# Allegro board DEVBOARD.brd
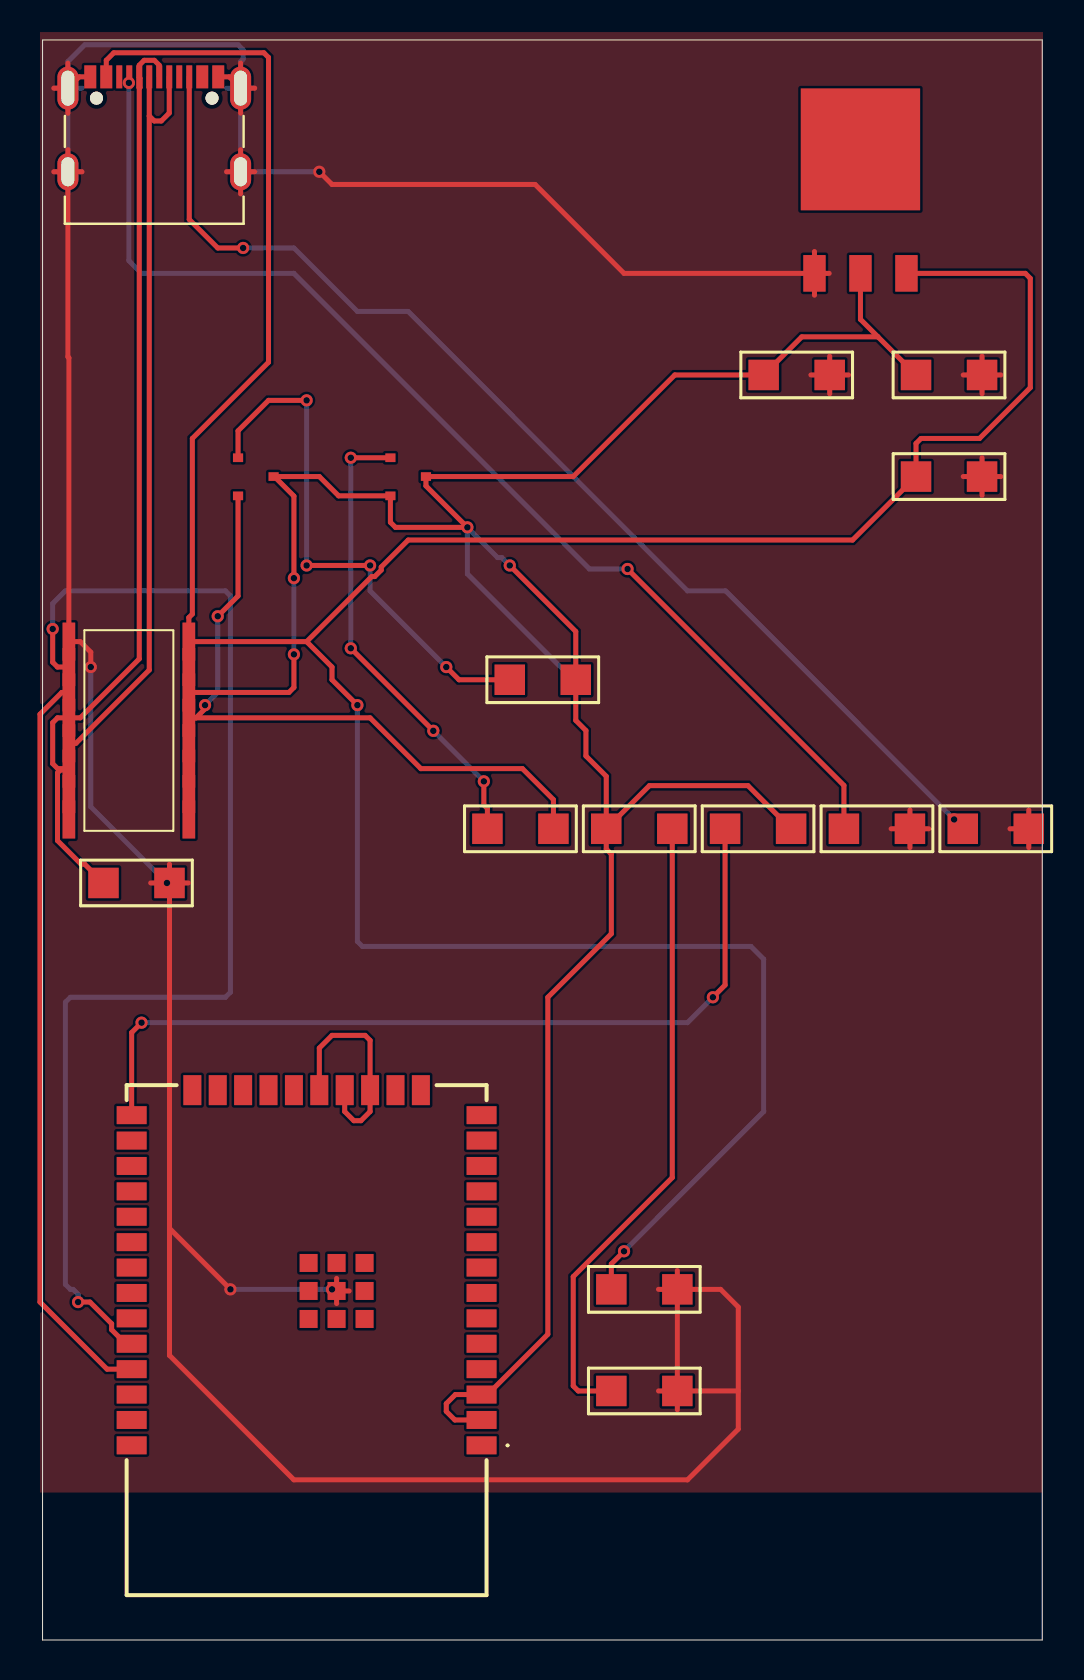
[diagram p0: board, top side]
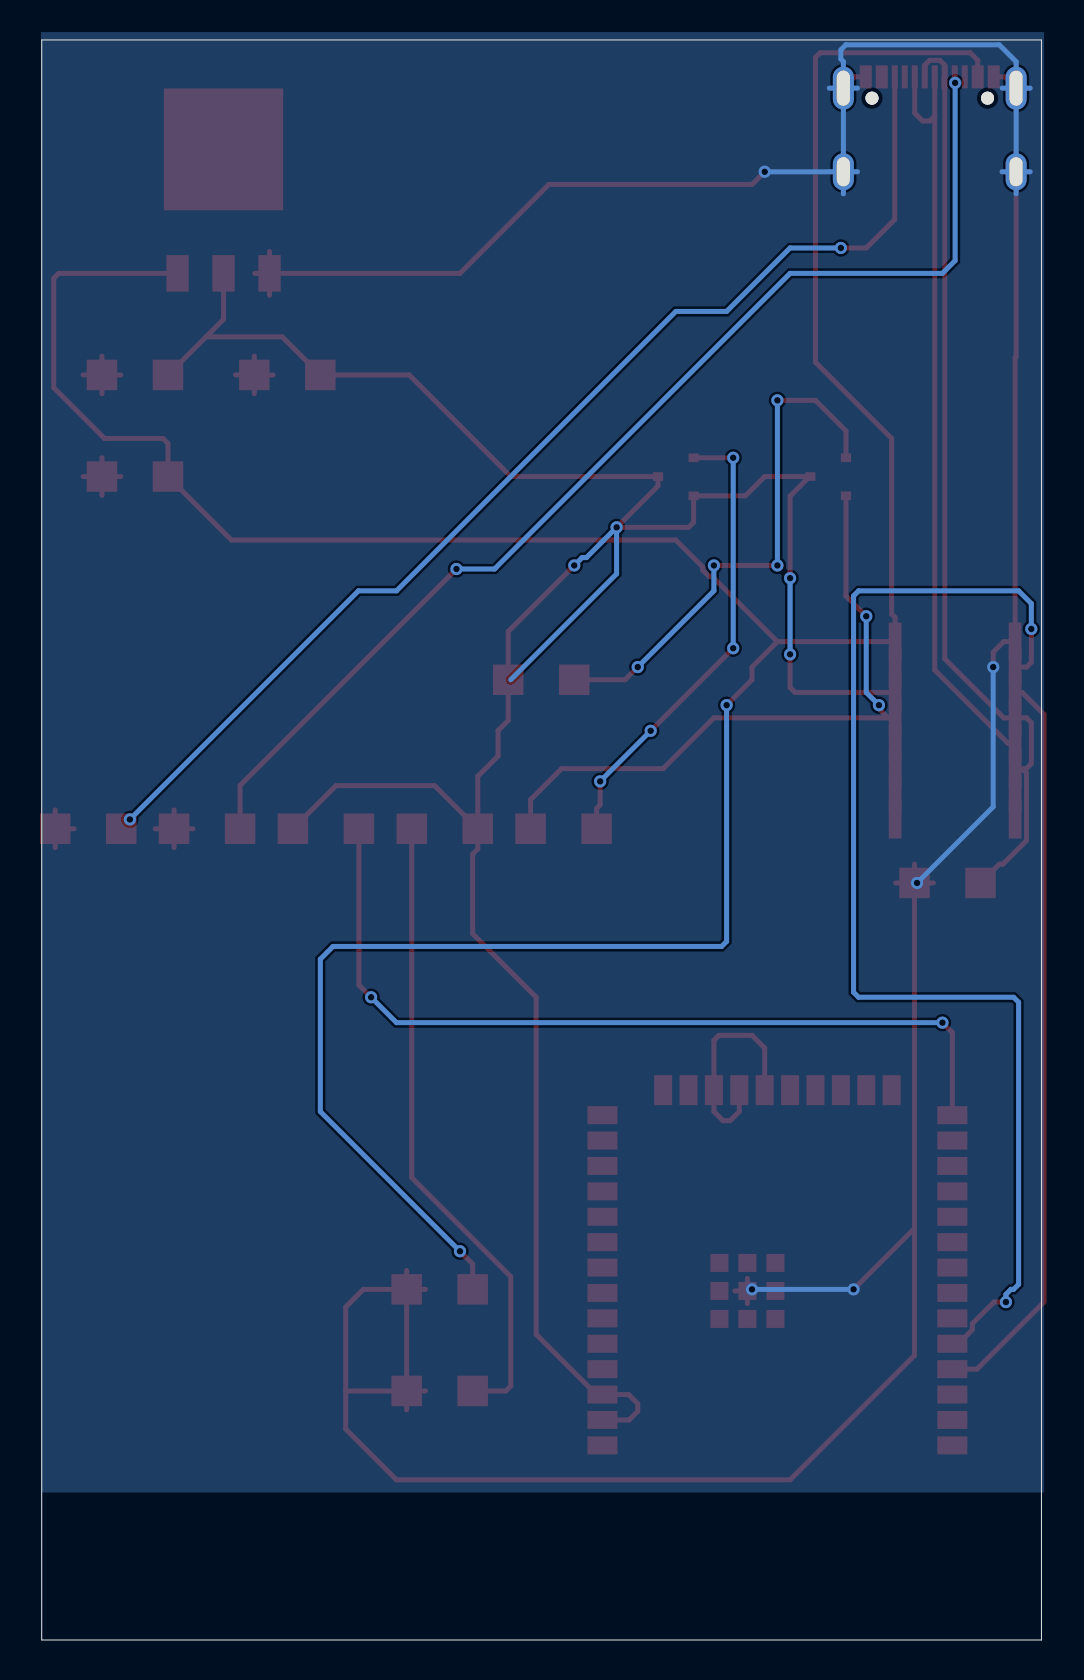
[diagram p1: board, bottom side, seen from below]

Outline 50 x 80 mm; copper layers: TOP, BOTTOM. Coordinates in mm from the lower left corner of the outline.
Outline path: 0,80 50,80 50,0 0,0 0,80

## Design rules (mm)
constraint set DEFAULT: min track width 0.25

## Placement (name value [footprint] x y rotation side)
C3  10u  [SMC1206]  43.69 63.25 0 top
C4  100u  [SMC1206]  36.07 63.25 0 top
C5  100n  [SMC1206]  3.05 37.85 0 top
C6  10u  [SMC1206]  43.69 58.17 0 top
C7  100u  [SMC1206]  28.45 17.53 0 top
C8  1u  [SMC1206]  28.45 12.45 0 top
IC1  ESP32-WROOM-32E-N8  [ESP32WROOM32EN8]  13.21 14.99 180 top
J1  10155435-00011LF  [AMPHENOL_10155435-00031LF]  5.59 73.41 0 top
Q1  NPN  [SOT23]  10.67 58.17 0 top
Q2  NPN  [SOT23]  18.29 58.17 0 top
R1  10k  [SMC1206]  23.37 48.01 0 top
R2  10k  [SMC1206]  22.25 40.56 0 top
R3  5.1k  [SMC1206]  40.08 40.56 0 top
R4  5.1k  [SMC1206]  46.02 40.56 0 top
R5  10k  [SMC1206]  28.19 40.56 0 top
R6  10k  [SMC1206]  34.14 40.56 0 top
U1  AMS1117-33  [AMS1117]  38.61 68.33 0 top
U2  -  [CH340C]  4.32 45.47 0 top

## Library data of the parts
C3-C7 = CAP
C8 = C
IC1 = ESP32-WROOM-32E-N8
J1 = 10155435-00011LF
Q1 Q2 = NPN
R1-R6 = R
U1 = AMS1117-33
U2 = CH340C

## Footprints (pads in the part's own frame, mm; a bottom-side part is the same pattern mirrored in y, then rotated)
AMPHENOL_10155435-00031LF
  round 0.65 hole 0.65 unplated: (-2.89,3.68) (2.89,3.68)
  rect 0.6x1.15 smd: A1_B12(-3.2,4.745) A4_B9(-2.4,4.745) B1_A12(3.2,4.745) B4_A9(2.4,4.745)
  rect 0.3x1.15 smd: A5(-1.25,4.745) A6(-0.25,4.745) A7(0.25,4.745) A8(1.25,4.745) B5(1.75,4.745) B6(0.75,4.745) B7(-0.75,4.745) B8(-1.75,4.745)
  oval 1.05x2.15 hole 0.65x1.75: SH1(-4.32,4.18) SH2(4.32,4.18)
  oval 1.05x1.85 hole 0.65x1.45: SH3(-4.32,0) SH4(4.32,0)
AMS1117
  rect 1.118x1.829 smd: 1(0,0) 2(2.3,0) 3(4.6,0)
  rect 5.969x6.096 smd: 4(2.3,6.2)
CH340C
  rect 0.635x1.905 smd: 1(-3,4.445) 2(-3,3.175) 3(-3,1.905) 4(-3,0.635) 5(-3,-0.635) 6(-3,-1.905) 7(-3,-3.175) 8(-3,-4.445) 9(3,-4.445) 10(3,-3.175) 11(3,-1.905) 12(3,-0.635) 13(3,0.635) 14(3,1.905) 15(3,3.175) 16(3,4.445)
ESP32WROOM32EN8
  rect 1.5x0.9 smd: 1(-8.75,5.26) 2(-8.75,3.99) 3(-8.75,2.72) 4(-8.75,1.45) 5(-8.75,0.18) 6(-8.75,-1.09) 7(-8.75,-2.36) 8(-8.75,-3.63) 9(-8.75,-4.9) 10(-8.75,-6.17) 11(-8.75,-7.44) 12(-8.75,-8.71) 13(-8.75,-9.98) 14(-8.75,-11.25) 25(8.75,-11.25) 26(8.75,-9.98) 27(8.75,-8.71) 28(8.75,-7.44) 29(8.75,-6.17) 30(8.75,-4.9) 31(8.75,-3.63) 32(8.75,-2.36) 33(8.75,-1.09) 34(8.75,0.18) 35(8.75,1.45) 36(8.75,2.72) 37(8.75,3.99) 38(8.75,5.26)
  rect 0.9x1.5 smd: 15(-5.715,-12.5) 16(-4.445,-12.5) 17(-3.175,-12.5) 18(-1.905,-12.5) 19(-0.635,-12.5) 20(0.635,-12.5) 21(1.905,-12.5) 22(3.175,-12.5) 23(4.445,-12.5) 24(5.715,-12.5)
  rect 0.9x0.9 smd: 39(-2.9,-1.06) 40(-2.9,-2.46) 41(-2.9,-3.86) 42(-1.5,-3.86) 43(-0.1,-3.86) 44(-0.1,-2.46) 45(-0.1,-1.06) 46(-1.5,-1.06) 47(-1.5,-2.46)
SMC1206
  rect 1.524x1.524 smd: 1(0,0) 2(3.302,0)
SOT23
  rect 0.508x0.432 smd: 1(-0.889,0.94) 2(-0.889,-0.965) 3(0.889,0)

## Nets
+3.3V: C3.1 C4.1 IC1.2 IC1.3 Q1.3 Q2.2(E) Q2.3 R1.2 R5.1 R6.2 U1.2(VOUT) U2.14
GND: C3.2 C4.2 C5.2 C6.2 C7.2 C8.2 IC1.47 J1.A1_B12 J1.B1_A12 J1.SH1 J1.SH2 J1.SH3 J1.SH4 R3.2 R4.2 U1.1 U2.1
VBUS: J1.B4_A9(VBUS#B4_A9)
N00220: C6.1 C7.1 J1.A4_B9 U1.3 U2.16(VCC)
N00580: C5.1 J1.A7 J1.B7 U2.4 U2.6
N00651: Q1.1 R1.1
N00688: Q1.2(E) R2.2 U2.13
N00700: Q2.1 R2.1
N02689: J1.A6 J1.B6 U2.5
N03722: J1.B5 R4.1
N03803: J1.A5 R3.1
N05631: IC1.34 U2.2
N05656: IC1.35(TXD0) U2.3
N05861: C8.1 R5.2
N16284: IC1.25 R6.1
N1550016: IC1.17 IC1.18 IC1.19

Pads without a net: IC1 1 4 5 6 7 8 9 10 11 12 13 14 15 16 20 21 22 23 24 26 27 28 29 30 31 32 33 36 37 38 39 40 41 42 43 44 45 46; J1 A8 B8; U1 4; U2 7 8 9 10 11 12 15

## Via types
v1: diameter 0.61, hole 0.33, TOP to BOTTOM, 29 vias

## Routing (per net, layer and track width the routed paths; a pad name or vN(x,y) marks a point on that pad's centre or on a via; arc(x,y) is an arc through that point)
+3.3V: length 137.4
  TOP w0.25: IC1.2 20.62,11 20.19,11.43 20.19,11.82 20.65,12.27 IC1.3 22.26,12.27 25.27,15.29 25.27,32.14 28.45,35.31 28.45,39.29 28.19,39.55 R5.1 ; 41.78,65.16 40.91,66.03 U1.2 ; 41.78,65.16 C3.1 ; 41.78,65.16 37.97,65.16 C4.1 31.62,63.25 26.54,58.17 Q2.3 19.18,57.7 v1(21.25,55.63) 17.65,55.63 17.4,55.89 17.4,57.21 14.81,57.21 13.84,58.17 11.59,58.17 ; v1(23.37,53.73) 26.67,50.42 R1.2 26.67,45.98 27.18,45.47 27.18,44.2 28.19,43.19 R5.1 ; v1(12.57,53.09) 12.57,57.19 11.59,58.17 ; R5.1 30.35,42.72 35.28,42.72 R6.2 ; 11.59,58.17 11.56,58.17 ; U2.14 12.32,47.38 12.57,47.63 v1(12.57,49.28)
  BOTTOM w0.25: v1(23.37,53.73) 22.97,54.12 22.76,54.12 v1(21.25,55.63) 21.25,53.31 26.54,48.01 ; v1(12.57,49.28) v1(12.57,53.09)
GND: length 224.2
  TOP w0.25: R3.2 44.32,40.56 ; R3.2 43.38,39.62 ; R3.2 42.44,40.56 ; R3.2 43.38,41.5 ; 9.2,73.41 J1.SH4 ; J1.SH4 9.91,72.31 ; J1.SH4 9.91,74.51 ; J1.SH4 10.61,73.41 ; 9.91,76.34 J1.SH2 ; J1.SH2 9.91,78.84 ; J1.SH2 9.34,78.16 8.79,78.16 ; J1.SH2 10.61,77.59 ; J1.SH1 1.27,78.84 ; J1.SH1 1.27,76.34 ; J1.SH1 0.56,77.59 ; J1.SH1 1.83,78.16 2.39,78.16 ; 38.61,67.24 U1.1 ; U1.1 38.61,69.42 ; U1.1 39.34,68.33 ; U1.1 29.08,68.33 24.64,72.78 14.48,72.78 v1(13.84,73.41) ; R4.2 49.33,41.5 ; R4.2 48.39,40.56 ; R4.2 49.33,39.62 ; 46.99,62.31 C3.2 ; C3.2 46.05,63.25 ; C3.2 46.99,64.19 ; C3.2 47.93,63.25 ; IC1.47 14.71,18.08 ; IC1.47 14.71,16.82 ; IC1.47 14.63,17.53 v1(14.48,17.53) ; IC1.47 15.33,17.45 ; J1.SH3 1.27,64.16 1.32,64.11 1.32,49.92 1.89,49.92 2.41,49.39 v1(2.41,48.65) ; J1.SH3 1.97,73.41 ; J1.SH3 0.56,73.41 ; J1.SH3 1.27,74.51 ; 6.35,20.58 v1(9.4,17.53) ; 6.35,20.58 C5.2 ; 6.35,20.58 6.35,14.23 12.57,8.01 32.26,8.01 34.8,10.55 34.8,12.45 ; C6.2 46.99,59.11 ; C6.2 46.99,57.23 ; C6.2 47.93,58.17 ; C6.2 46.05,58.17 ; 31.75,11.51 C8.2 ; C8.2 34.8,12.45 ; C8.2 C7.2 ; C8.2 30.81,12.45 ; C4.2 39.37,64.19 ; C4.2 38.43,63.25 ; C4.2 40.31,63.25 ; C4.2 39.37,62.31 ; 34.8,12.45 34.8,16.65 33.91,17.53 C7.2 ; C5.2 7.29,37.85 ; C5.2 6.35,38.79 ; C5.2 5.41,37.85 ; C7.2 31.75,18.47 ; C7.2 30.81,17.53
  BOTTOM w0.25: v1(9.4,17.53) v1(14.48,17.53) ; v1(6.22,37.85) 2.41,41.66 v1(2.41,48.65) ; J1.SH2 J1.SH4 ; J1.SH2 9.91,78.92 10.03,79.04 10.03,79.51 9.78,79.76 2.11,79.76 1.27,78.92 J1.SH1 ; J1.SH2 10.61,77.59 ; J1.SH2 9.2,77.59 ; J1.SH4 9.2,73.41 ; J1.SH4 9.91,72.31 ; J1.SH4 v1(13.84,73.41) ; J1.SH1 J1.SH3 ; J1.SH1 0.56,77.59 ; J1.SH1 1.97,77.59 ; J1.SH3 1.97,73.41 ; J1.SH3 0.56,73.41 ; J1.SH3 1.27,72.31
N00220: length 156.6
  TOP w0.25: 13.21,49.92 7.32,49.92 7.32,51.12 7.49,51.3 7.49,60.08 11.3,63.89 11.3,79.13 11.07,79.36 3.56,79.36 3.19,78.98 3.19,78.16 ; 13.21,49.92 14.48,48.65 14.48,48.01 v1(15.75,46.74) ; 13.21,49.92 16.46,53.17 16.61,53.17 16.94,53.5 16.94,53.65 18.29,55 40.51,55 C6.1 43.69,59.83 43.94,60.08 46.86,60.08 49.4,62.62 49.4,68.08 49.15,68.33 U1.3 ; v1(29.08,19.44) 28.45,18.8 C7.1
  BOTTOM w0.25: v1(15.75,46.74) 15.75,34.93 16,34.68 35.43,34.68 36.07,34.04 36.07,26.42 v1(29.08,19.44)
N00580: length 47.3
  TOP w0.25: C5.1 2.11,38.79 1.93,38.79 0.75,39.97 0.75,43.35 0.89,43.5 1.25,43.5 U2.6 0.76,43.57 0.51,43.82 0.51,45.87 0.75,46.11 U2.4 1.89,46.11 4.84,49.06 4.84,77.59 4.87,77.63 4.87,78.09 4.84,78.12 4.84,78.74 5.08,78.98 5.59,78.98 5.84,78.74 5.84,78.16
N00651: length 26.9
  TOP w0.25: Q1.1 9.78,60.46 11.3,61.98 v1(13.21,61.98) ; v1(20.19,48.65) 20.83,48.01 R1.1 ; v1(13.21,53.73) v1(16.38,53.73)
  BOTTOM w0.25: v1(16.38,53.73) 16.38,52.46 v1(20.19,48.65) ; v1(13.21,61.98) v1(13.21,53.73)
N00688: length 33.4
  TOP w0.25: v1(8.76,51.19) 9.78,52.2 Q1.2 ; 7.67,46.11 8.13,46.56 v1(8.13,46.74) ; 7.67,46.11 U2.13 ; 7.67,46.11 16.38,46.11 18.92,43.57 24,43.57 25.55,42.02 R2.2
  BOTTOM w0.25: v1(8.13,46.74) 8.76,47.38 v1(8.76,51.19)
N00700: length 23.4
  TOP w0.25: v1(15.42,49.59) v1(19.54,45.46) ; v1(22.07,42.93) 22.07,41.75 22.25,41.57 R2.1 ; 17.4,59.11 v1(15.42,59.11)
  BOTTOM w0.25: v1(15.42,59.11) v1(15.42,49.59) ; v1(19.54,45.46) v1(22.07,42.93)
N02689: length 38.3
  TOP w0.25: 5.34,76.2 5.34,48.5 1.67,44.84 U2.5 ; 5.34,76.2 5.59,75.95 5.94,75.95 6.34,76.35 6.34,78.16 ; 5.34,76.2 5.34,78.16
N03722: length 57.8
  TOP w0.25: 7.34,78.16 7.34,71.03 8.76,69.6 v1(10.03,69.6)
  BOTTOM w0.25: v1(10.03,69.6) 12.57,69.6 15.75,66.43 18.29,66.43 32.26,52.46 34.16,52.46 v1(45.59,41.03)
N03803: length 57.7
  TOP w0.25: R3.1 40.08,42.73 v1(29.26,53.55)
  BOTTOM w0.25: v1(4.32,77.86) 4.32,68.97 4.95,68.33 12.57,68.33 27.35,53.55 v1(29.26,53.55)
N05631: length 60.4
  TOP w0.25: IC1.34 4.16,14.81 3.45,15.51 3.45,15.81 2.37,16.9 v1(1.78,16.9) ; v1(0.51,50.55) 0.51,48.89 0.75,48.65 U2.2
  BOTTOM w0.25: v1(1.78,16.9) 1.78,17.28 1.53,17.53 1.39,17.53 1.14,17.78 1.14,31.89 1.39,32.14 9.15,32.14 9.4,32.39 9.4,52.21 9.15,52.46 1.14,52.46 0.51,51.82 v1(0.51,50.55)
N05656: length 37.3
  TOP w0.25: IC1.35 3.23,13.54 -0.13,16.9 -0.13,46.29 0.96,47.38 U2.3
N05861: length 31.9
  TOP w0.25: C8.1 26.79,12.45 26.54,12.7 26.54,18.17 31.49,23.12 R5.2
N16284: length 42.6
  TOP w0.25: v1(33.53,32.14) 34.14,32.75 R6.1 ; v1(4.95,30.87) 4.46,30.37 IC1.25
  BOTTOM w0.25: v1(33.53,32.14) 32.26,30.87 v1(4.95,30.87)
N1550016: length 11.3
  TOP w0.25: IC1.18 15.11,26.42 15.57,25.96 15.92,25.96 16.38,26.42 IC1.17 16.38,29.98 16.13,30.23 14.48,30.23 13.84,29.6 IC1.19

## Copper pours and planes (outline as drawn; the poured copper is in the pictures)
GND on TOP, BOTTOM: -0.13,80.4 -0.13,7.37 50.04,7.37 50.04,80.4
